# Altium PCB LED主控.pcbdoc (part 2 of 2)
Units mil, origin at the board's own origin, x right, y up, seen from the top; angles counter-clockwise.
Board outline 4187.79 x 2551 mil, 2 copper layers (Top Layer, Bottom Layer); 58 components, 35 nets, 197 pads, 174 vias.
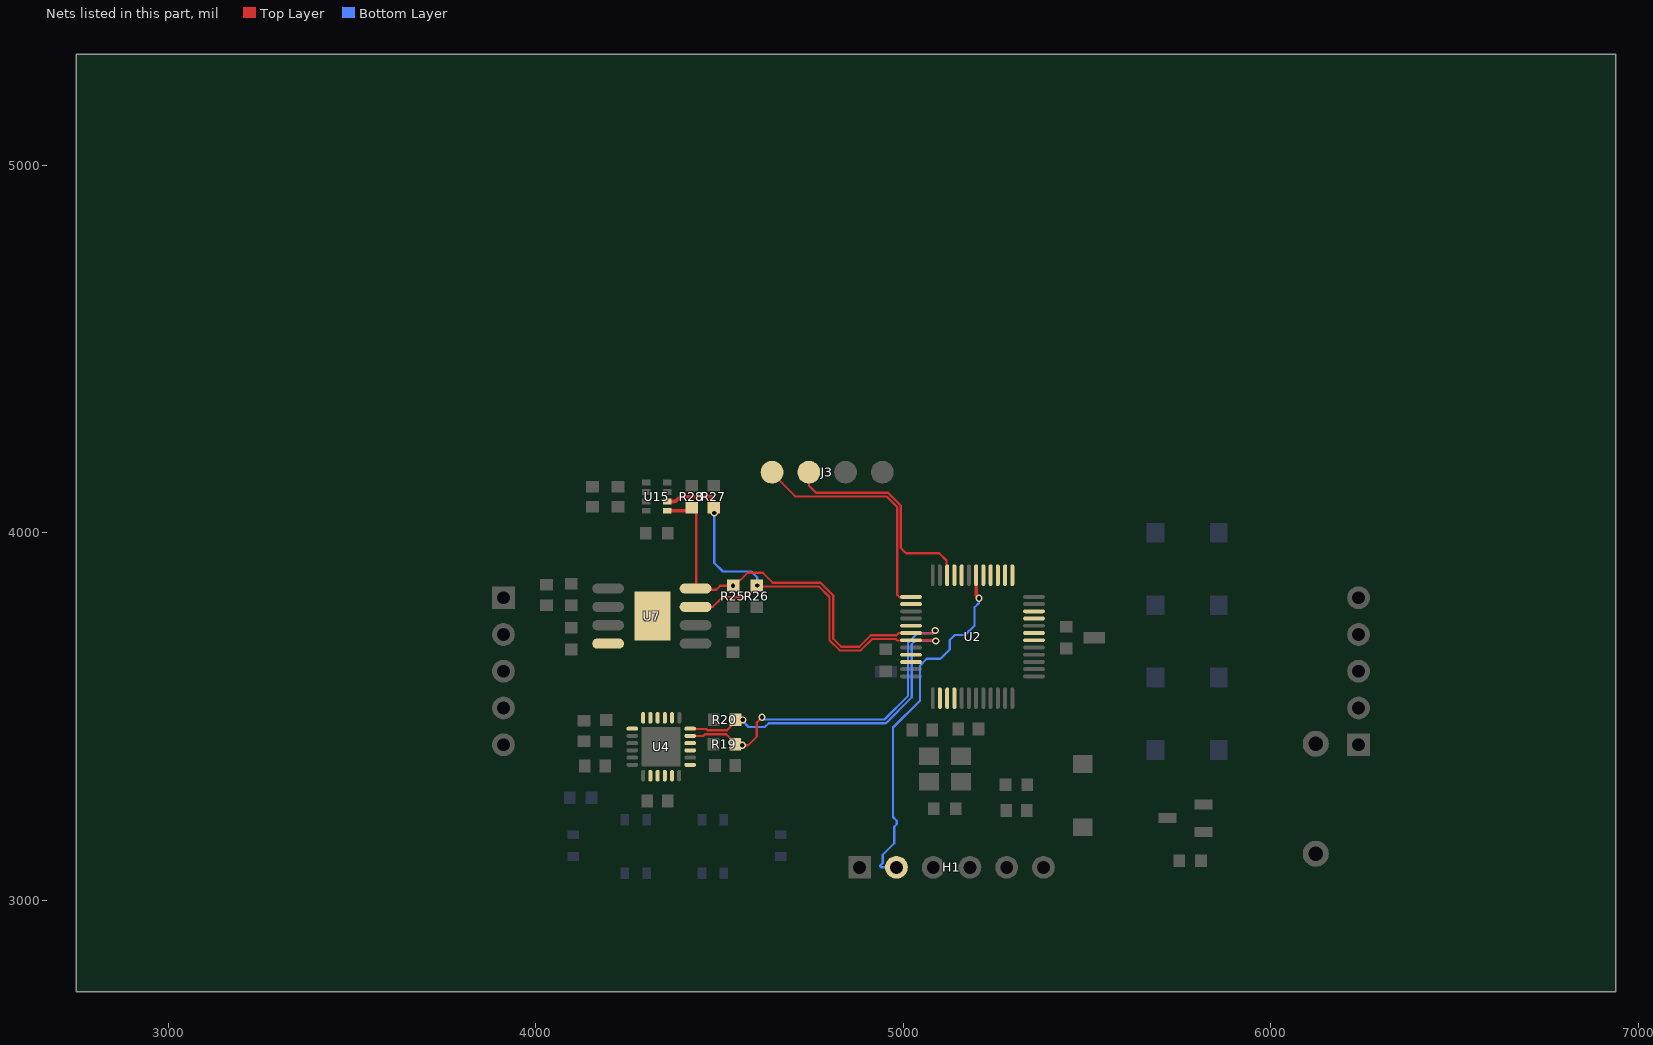
[diagram p2: the nets of this part, all layers, seen from the top]

## Via types
v1: diameter 19.68, hole 11.81, Top Layer to Bottom Layer, 173 vias
v2: diameter 24.02, hole 12.01, Top Layer to Bottom Layer, 1 vias

## Nets (pads, with @x,y where several pads share a name; then routed paths per layer and width w, separated by ;. In a path a pad name is that pad's centre, name@x,y a point inside that pad or via, vN(x,y) a via of type N, cw(c..) or ccw(c..) an arc to the next point about the centre after c; other vN are vias at no path point) (continued)
SCL: R19.1 R25.1 R28.2 U2.42 U4.23 U7.8 U15.4 | length 2019.5
  Top Layer w6: R28.2@4422.12,4065.72 4436.47,4051.37 U7.8@4436.47,3851.86 ; U4.23@4424.56,3446.87 4455.35,3446.87 4455.47,3446.75 4460.01,3451.29 4518.39,3451.29 R19.1@4540.46,3429.21 ; U7.8@4443.15,3844.21 4490.75,3844.21 4501.93,3855.39 R25.1@4536.52,3855.39 ; R25.1@4537.25,3856.12 R25.1@4536.52,3855.39 ; R25.1@4539.95,3854.52 4576.38,3890.94 4617.41,3890.94 4644.72,3863.64 4774.26,3863.64 4809.1,3828.79 4809.1,3711.42 4830.99,3689.53 4879.94,3689.53 4911.1,3720.69 4981.29,3720.69 4987.29,3726.69 U2.42@5021.79,3726.69 ; R25.1@4539.95,3855.39 R25.1@4536.52,3855.39 ; v1(4561.83,3421.59) 4577.56,3421.59 4600.86,3444.89 4600.86,3483.32 v1(4615.42,3497.87) ; U2.42@5020.43,3725.08 5078.5,3725.08 v1(5086.9,3733.48)
  Top Layer w10: U15.4@4357.43,4059.15 4402.81,4059.15 ccw(c4402.81,4088.96) R28.2@4423.89,4067.88
  Bottom Layer w6: v1(4615.42,3497.87) 4621.84,3491.45 4948.67,3491.45 5012.98,3555.76 5012.98,3700.63 5038.65,3726.3 5079.72,3726.3 v1(5086.9,3733.48)
  other v1: 4536.61,3855.73
SDA: R20.1 R26.1 R27.2 U2.43 U4.24 U7.7 U15.3 | length 2120.4
  Top Layer w6: U4.24@4423.15,3465.64 4463.71,3465.64 4466.9,3462.45 4519.98,3462.45 R20.1@4538.62,3481.09 ; U7.7@4434.73,3797.85 4481.34,3797.85 4507.73,3824.24 4572.73,3824.24 4601.67,3853.18 R26.1@4601.67,3856.17 ; R26.1@4603.16,3853.62 4770.11,3853.62 4799.09,3824.64 4799.09,3707.27 4826.85,3679.51 4884.06,3679.51 4915.24,3710.69 4979.13,3710.69 4983.23,3706.59 U2.43@5021.86,3706.59 ; U2.43@5023.99,3706.8 5086.35,3706.8 v1(5088.01,3705.15)
  Top Layer w10: U15.3@4357.43,4084.75 4374.69,4084.75 ccw(c4374.69,4096.09) 4382.71,4088.07 cw(c4406.04,4064.74) 4406.04,4097.74 4473.48,4097.74 cw(c4473.48,4089.13) 4479.57,4095.22 cw(c4467.4,4083.04) 4484.61,4083.04 R27.2@4484.61,4066.22
  Bottom Layer w6: v1(4485.59,4053.21) 4485.59,3917.44 4508.95,3894.08 4585.94,3894.08 4602.35,3877.67 v1(4602.35,3856.22) ; v1(4562.66,3490.3) 4562.66,3487.18 4578.87,3470.97 4622.99,3470.97 4633.46,3481.45 4952.83,3481.45 5023,3551.61 5023,3696.51 5031.64,3705.15 v1(5088.01,3705.15)
SWCLK: J3.4 U2.37 | length 654.8
  Top Layer w6: J3.4@4647.47,4157.02 4705.98,4098.52 4953.99,4098.52 4983.1,4069.41 4983.1,3830.96 4989.72,3824.34 5023.88,3824.34 U2.37@5024.55,3823.66
SWDIO: J3.3 U2.34 | length 604.4
  Top Layer w6: J3.3@4742.91,4163.09 4742.91,4127.85 4762.24,4108.52 4958.13,4108.52 4993.11,4073.54 4993.11,3957.96 5007.27,3943.8 5097.79,3943.8 5117.47,3924.11 U2.34@5117.47,3881.62
TX: H1.2 U2.30 | length 993.1
  Top Layer w10: U2.30@5198.2,3878.91 5198.2,3828.99 v1(5205.68,3821.51)
  Bottom Layer w6: H1.2@4981.11,3089.24 4939.23,3089.24 4937.11,3091.36 4937.11,3094.36 4943.64,3100.89 4943.64,3123.29 4975.23,3154.87 4975.23,3200.28 4981.77,3206.82 4981.77,3216.12 4971.92,3225.97 4971.92,3469.39 5045.01,3542.49 5045.01,3637.79 5063.71,3656.48 5101.11,3656.48 5126.28,3681.65 5126.28,3707.63 5139.89,3721.24 5167.7,3721.24 5193.87,3747.4 5193.87,3796.85 5205.68,3808.67 v1(5205.68,3821.51)
"": U2.2 U2.3 U2.4 U2.18 U2.19 U2.21 U2.22 U2.25 U2.26 U2.27 U2.28 U2.29 U2.32 U2.33 U2.38 U2.41 U2.45 U2.46 U4.2 U4.3 U4.4 U4.5 U4.6 U4.7 U4.14 U4.15 U4.16 U4.17 U4.19 U4.21 U4.22 U7.4 U7.9

## Polygon pours and split planes (outlines as drawn)
GND on Bottom Layer (solid, remove dead copper, pour order 0): 3825.29,3001.27 6687.79,3001.27 6687.79,4493.27 3825.29,4493.27
GND on Top Layer (hatched 45Degree grid 20 track 10, remove dead copper, pour order 1): 3000,3000 6512.6,3000 6512.6,5051 3000,5051

## Keep-outs
Top Layer:
  region net "": 4126.81,3093.27 4641.81,3093.27 4641.81,3193.27 4126.81,3193.27
  region net "": 4126.81,3093.27 4641.81,3093.27 4641.81,3193.27 4126.81,3193.27
Bottom Layer:
  region net "": 5029.05,3225.28 5194.07,3225.28 5194.07,3474.64 5029.05,3474.64
  region net "": 4126.81,3093.27 4641.81,3093.27 4641.81,3193.27 4126.81,3193.27
Board Outline Layer:
  lines w10 net "": 3861.81,3032.17 6288.58,3032.17 6288.58,4213.27 3861.81,4213.27 3861.81,3032.17

## Other copper
Top Layer:
  region net KEY3: 6233.93,3460.08 6225.44,3460.08 6221.2,3453.72 6269.58,3453.72
  region net MAX7219_CS: 3929.14,3497.01 3964.04,3515.71 3964.82,3521.71 3935.15,3543.12
  region net MAX7219_DIN: 3932.99,3600.09 3964.59,3620.64 3964.42,3626.64 3931.62,3646.57
  region net 3V3: 3915.31,3868.72 3902.81,3853.72 3937.81,3853.72 3925.31,3868.72
  region net 3V3: 4121.17,4129.79 4121.17,4119.79 4136.17,4109.35 4136.17,4140.85
  region net 3V3: 4186.61,4120.94 4186.61,4130.94 4171.61,4140.85 4171.61,4109.35
  region net 3V3: 4191.17,4120.94 4206.17,4109.35 4206.17,4140.85 4191.17,4130.94
  region net 3V3: 4241.74,4128.4 4241.74,4138.4 4213.1,4140.85 4241.61,4115.9
  region net $1N131: 4298.23,4029.55 4285.73,4014.55 4315.11,4014.55 4308.23,4029.55
  region net SCL: 4402.81,4064.15 4402.81,4054.15 4432.35,4052.01 4406.88,4077.34
  region net 3V3: 4403.43,4130.21 4403.43,4120.21 4406.88,4111.33 4406.88,4142.71
  region net 3V3: 4449.9,4129.19 4440.9,4136.69 4440.9,4115.69 4449.9,4123.19
  region net SDA: 4476.04,4091.68 4466.88,4083.76 4500.9,4083.76 4484.28,4097.48
  region net 3V3: 4457.88,4129.19 4457.88,4123.19 4466.88,4115.69 4466.88,4136.69
  region net 3V3: 4332.93,4095.02 4345.62,4102.46 4345.62,4118.21 4332.05,4107.07
  region net 3V3: 4381.38,4121.08 4369.24,4118.21 4369.24,4102.46 4383.23,4109.78
  region net 3V3: 4334.1,4125.16 4332.23,4113.64 4345.62,4102.46 4345.62,4118.21
  region net SDA: 4374.69,4089.75 4369.24,4092.63 4369.24,4076.88 4374.69,4079.75
  region net SCL: 4384.24,4064.15 4369.24,4067.03 4369.24,4051.28 4384.24,4054.15
  region net 3V3: 4324.3,4120.76 4325.84,4132.21 4312.16,4143.81 4312.16,4128.06
  region net 3V3: 4273.54,4128.3 4288.54,4128.06 4288.54,4143.81 4273.54,4138.3
  region net 3V3: 4323.59,4099.85 4312.16,4092.63 4312.16,4076.88 4325.69,4088.56
  region net $1N131: 4298.23,4046.7 4308.23,4046.7 4312.16,4051.28 4288.54,4051.28
  region net BAT: 4509.96,3737.24 4509.96,3731.24 4518.96,3723.74 4518.96,3744.74
  region net 3V3: 4607.41,3765.98 4618.68,3780.98 4584.91,3780.98 4597.41,3765.98
  region net 3V3: 4575.66,3799.82 4575.66,3793.82 4584.66,3786.32 4584.66,3807.32
  region net SDA: 4578.3,3834.05 4586.67,3833.93 4603.64,3840.3 4584.66,3851.02
  region net SDA: 4627.68,3856.62 4618.68,3864.12 4618.68,3843.12 4627.68,3850.62
  region net 3V3: 4562.68,3799.82 4553.68,3807.32 4553.68,3786.32 4562.68,3793.82
  region net SCL: 4510.66,3852.39 4519.66,3844.89 4519.66,3865.89 4510.66,3858.39
  region net SCL: 4560.05,3870.37 4559.6,3878.41 4542.63,3872.05 4553.68,3853.4
  region net 3V3: 4064.67,3808.25 4064.67,3798.24 4079.66,3785.98 4079.66,3817.73
  region net 3V3: 4122.68,3804.85 4113.68,3812.35 4113.68,3791.35 4122.68,3798.85
  region net $1N255: 4122.21,3860.66 4113.68,3868.16 4113.68,3847.16 4122.21,3854.66
  region net 3V3: 4083.08,3655.37 4113.68,3665.98 4079.66,3683.78 4069.06,3655.49
  region net DS3231_INT: 4122.68,3744.17 4113.68,3751.67 4113.68,3730.67 4122.68,3738.17
  region net $1N255: 4144.65,3850.35 4144.87,3844.35 4158.89,3836.85 4157.72,3857.85
  region net 3V3: 4144.8,3801.05 4144.71,3795.05 4158.04,3787.55 4158.52,3808.55
  region net DS3231_INT: 4145.14,3752.24 4144.51,3746.24 4156.86,3738.74 4160.23,3759.74
  region net SCL: 4487.02,3847.21 4476.2,3854.71 4464.25,3834.07 4485.33,3841.21
  region net SCL: 4439.47,3870.63 4433.47,3870.63 4425.97,3861.63 4446.97,3861.63
  region net SDA: 4481.34,3800.85 4473.18,3808.35 4473.18,3787.35 4481.34,3794.85
  region net BAT: 4479.11,3750.85 4473.18,3758.35 4473.18,3737.35 4479.11,3744.85
  region net $1N1026: 4217.18,3432.42 4208.18,3439.92 4208.18,3418.92 4217.18,3426.42
  region net 3V3: 4490.13,3522.44 4480.13,3522.44 4468.2,3507.44 4499.95,3507.44
  region net SDA: 4521.16,3467.87 4528.83,3467.06 4545.8,3473.42 4527.52,3484.84
  region net 3V3: 4508.45,3420.53 4508.45,3426.53 4499.45,3434.03 4499.45,3413.03
  region net SCL: 4527.12,3446.8 4520.66,3444.78 4527.02,3427.8 4544.09,3440.43
  region net 3V3: 4098.45,3434.98 4098.45,3424.98 4113.45,3417.01 4113.45,3447.48
  region net 3V3: 4155.25,3454.8 4138.34,3448.51 4148.89,3429.35 4155.25,3446.32
  region net $1N454: 4206.32,3389.4 4189.35,3383.03 4204.48,3368.47 4210.84,3385.44
  region net 3V3: 4383.48,3261.75 4374.48,3269.25 4374.48,3252.6 4383.48,3255.75
  region net 3V3: 4363.67,3296.64 4357.67,3296.64 4350.17,3288.03 4371.17,3288.03
  region net 3V3: 4238.25,3449.27 4238.99,3443.27 4252.19,3441.32 4252.19,3452.34
  region net $1N1026: 4242.67,3429.29 4242.67,3423.29 4252.19,3421.63 4252.19,3432.65
  region net $1N454: 4238.12,3409.61 4239.25,3403.61 4252.19,3401.95 4252.19,3412.97
  region net MPU6050_INIT: 4242.81,3363.55 4252.19,3362.58 4252.19,3373.6 4242.81,3369.55
  region net 3V3: 4294.13,3316.28 4297.47,3328.33 4286.45,3328.33 4288.13,3316.28
  region net $1N460: 4444.56,3388.82 4430.15,3393.28 4430.15,3382.26 4441.56,3382.82
  region net SCL: 4443.74,3449.87 4430.15,3452.34 4430.15,3441.32 4443.8,3443.87
  region net SDA: 4444.23,3468.64 4430.15,3472.02 4430.15,3461 4443.07,3462.64
  region net BOOT0: 4978.67,3690.42 4969.67,3697.92 4969.67,3676.92 4978.67,3684.42
  region net BOOT1: 5416.72,3748.13 5416.72,3742.13 5425.72,3734.63 5425.72,3755.63
  region net $1N3910: 5440.65,3708.71 5433.15,3700.45 5454.15,3700.45 5446.65,3708.71
  region net $1N3910: 5480.89,3716.73 5480.89,3710.73 5489.89,3703.23 5489.89,3724.23
  region net 3V3: 5341.06,3340.24 5335.06,3340.24 5327.56,3331.24 5348.56,3331.24
  region net NRST: 5255.09,3310.41 5262.19,3302.91 5262.19,3323.91 5255.09,3316.41
  region net NRST: 5278.77,3288.23 5284.77,3288.23 5292.27,3297.23 5271.27,3297.23
  region net NRST: 5278.77,3270.95 5271.27,3261.95 5292.27,3261.95 5284.77,3270.95
  region net NRST: 5283.46,3217.53 5291.4,3226.52 5270.38,3226.52 5277.45,3217.53
  region net NRST: 5451.96,3200.14 5451.96,3194.14 5460.96,3186.64 5460.96,3207.64
  region net 3V3: 5059.54,3554.58 5059.54,3544.58 5074.54,3532.08 5074.54,3567.08
  region net 3V3: 5074.55,3583.32 5074.54,3573.82 5085.17,3573.82 5084.55,3583.32
  region net PD0: 5161.59,3515.12 5163.9,3525.41 5153.27,3525.41 5155.59,3515.12
  region net PD1: 5181.28,3515.12 5183.6,3525.4 5172.97,3525.4 5175.28,3515.12
  region net NRST: 5194.51,3512.37 5200.51,3511.74 5203.28,3525.41 5192.65,3525.41
  region net 3V3: 5240.49,3513.22 5242.64,3525.4 5232.01,3525.4 5234.49,3513.22
  region net KEY1: 5259.72,3511.83 5262.33,3525.41 5251.7,3525.41 5253.72,3512.24
  region net KEY2: 5279.51,3517.1 5282.01,3525.4 5271.38,3525.4 5273.51,3517.1
  region net KEY3: 5298.42,3519.57 5301.7,3525.41 5291.07,3525.41 5292.42,3519.57
  region net MAX7219_CS: 5317.43,3610.95 5318.44,3604.95 5331.23,3603.36 5331.23,3613.99
  region net KEY4: 5392.58,3631.94 5379.65,3633.67 5379.65,3623.04 5393.39,3625.94
  region net MAX7219_CLK: 5318.28,3651.6 5317.49,3645.6 5331.22,3642.72 5331.22,3653.35
  region net MAX7219_DIN: 5317.27,3689.32 5318.82,3683.32 5331.23,3682.08 5331.23,3692.71
  region net BOOT1: 5393.7,3748.13 5379.65,3751.79 5379.65,3741.16 5391.72,3742.13
  region net 3V3: 5362.52,3839.52 5356.52,3839.52 5349.02,3830.52 5370.02,3830.52
  region net TX: 5203.2,3844.14 5203.28,3860.04 5192.65,3860.04 5193.2,3842.68
  region net RX: 5183.16,3842.95 5183.6,3860.05 5172.97,3860.05 5173.16,3843.61
  region net SWDIO: 5114.47,3919.86 5113.9,3908.46 5124.53,3908.46 5120.47,3922.63
  region net 3V3: 5065.54,3884.06 5065.54,3878.06 5074.54,3870.56 5074.54,3891.56
  region net SWCLK: 4989.72,3821.34 4996.59,3819.89 4996.59,3830.52 4989.72,3827.34
  region net DS3231_INT: 4980.83,3780.58 4996.59,3780.52 4996.59,3791.15 4979.18,3790.58
  region net MPU6050_INIT: 4979.64,3761.2 4996.58,3760.83 4996.58,3771.46 4979.94,3771.2
  region net SCL: 4987.29,3723.69 4996.59,3721.46 4996.59,3732.09 4987.29,3729.69
  region net SCL: 5059.17,3728.08 5045.01,3732.09 5045.01,3721.46 5056.49,3722.08
  region net SDA: 4983.23,3709.59 4983.59,3703.59 4996.59,3701.78 4996.59,3712.41
  region net SDA: 5058.59,3709.8 5045.01,3712.41 5045.01,3701.78 5058.19,3703.8
  region net BOOT0: 4983.21,3690.42 4983.19,3684.42 4996.59,3682.09 4996.59,3692.72
  region net 3V3: 5016.76,3594.35 5022.76,3594.35 5030.26,3603.35 5009.26,3603.35
  region net 3V3: 4989.59,3611.65 4989.59,3605.65 4996.59,3603.35 4996.59,3613.98
  region net $1N1067: 5813.84,3132.87 5806.34,3123.87 5825.77,3123.87 5819.84,3132.87
  region net $1N815: 6150.4,3147.5 6127.81,3186.12 6121.81,3186.57 6097.4,3151.52
  region net 3V3: 6097.33,3400.04 6121.7,3364.92 6127.7,3365.36 6150.33,3403.91
  region net $1N1067: 5813.84,3163.03 5819.84,3163.03 5827.34,3172.03 5806.34,3172.03
  region net $1N815: 5839.51,3240.46 5841.48,3249.11 5792.26,3246.83 5831.03,3240.46
  region net SWDIO: 4719.6,4143.6 4739.91,4127.85 4745.91,4127.85 4766.1,4143.87
  region net SWCLK: 4639.04,4133.46 4676.5,4123.75 4680.99,4127.75 4673.73,4164.43
  region net PD1: 5120.05,3388.21 5129.05,3380.71 5129.05,3401.71 5120.05,3394.21
  region net PD0: 5106.55,3325.31 5097.55,3332.81 5097.55,3311.81 5106.55,3319.31
  region net PD1: 5127.18,3448.36 5129.46,3442.15 5146.43,3448.51 5133.55,3465.33
  region net PD1: 5127.18,3482.3 5127.18,3473.81 5133.55,3448.51 5136.14,3483.95
  region net PD0: 5101.02,3474.66 5101.02,3483.14 5088.35,3481.07 5094.66,3457.69
  region net PD0: 5098.75,3439.28 5101.02,3445.49 5094.66,3462.46 5081.78,3445.64
  region net PD0: 5105.33,3246.24 5105.33,3252.24 5098.94,3259.74 5098.94,3238.74
  region net PD1: 5121.57,3252.24 5121.57,3246.24 5126.51,3238.74 5126.51,3259.74
  region net 3V3: 4061.66,3808.3 4046.67,3818.48 4046.67,3786.98 4061.66,3798.3
  region net 3V3: 3996.23,3807.52 3996.23,3797.52 4011.23,3786.98 4011.23,3818.48
  region net 3V3: 5526.35,3797.81 5516.35,3797.81 5503.85,3779.51 5538.85,3776.68
  region net 3V3: 4881.98,3640.92 4875.98,3640.92 4868.48,3636.59 4889.48,3636.59
  region net 3V3: 4904.36,3599.23 4898,3616.2 4884.51,3599.98 4901.48,3593.62
  region net 3V3: 5040.35,3884.06 5031.35,3891.56 5031.35,3870.56 5040.35,3878.06
  region net 3V3: 5362.52,3853.97 5370.02,3862.97 5349.02,3862.97 5356.52,3853.97
  region net 3V3: 5280.53,3435.95 5288.03,3444.95 5267.03,3444.95 5274.53,3435.95
  region net 3V3: 5280.53,3417.53 5274.53,3417.53 5267.03,3408.53 5288.03,3408.53
  region net 3V3: 5281.81,3360.95 5288.96,3369.95 5267.94,3369.95 5275.8,3360.95
  region net 3V3: 5016.76,3586.84 5009.26,3577.84 5030.26,3577.84 5022.76,3586.84
  region net 3V3: 5049.87,3554.58 5034.87,3567.08 5034.87,3539.26 5049.87,3544.58
  region net SCL: 4529.85,3862.88 4519.77,3858.39 4519.98,3852.39 4530.36,3848.12
  region net SCL: 4545.69,3851.93 4552.01,3862.33 4549.23,3868.04 4539.24,3865.21
  region net SDA: 4592.56,3855.16 4589.24,3844.99 4594.21,3841.48 4604.62,3846.64
  region net SDA: 4606.68,3847.38 4618.16,3850.62 4619.81,3856.62 4610.58,3861.62
  region net SCL: 4568.34,3414.21 4577.56,3418.59 4577.56,3424.59 4568.34,3428.97
  region net SCL: 5077.08,3734.09 5076.38,3727.2 5080.62,3722.95 5087.52,3723.65
  region net SDA: 5082.83,3713.52 5071.83,3709.8 5070.8,3703.8 5080.35,3698.96
  region net SCL: 4605.59,3498.49 4601.46,3488.16 4605.71,3483.92 4616.03,3488.05
  region net MPU6050_INIT: 4245.51,3359.01 4255.52,3363.55 4255.22,3369.55 4244.77,3373.76
  region net DS3231_INT: 4192.09,3755.61 4180.73,3752.24 4179.26,3746.24 4188.56,3741.27
  region net MAX7219_CS: 5309.44,3600.11 5318.98,3604.95 5317.96,3610.95 5306.96,3614.66
  region net MAX7219_CLK: 5309.97,3640.65 5319.31,3645.6 5317.89,3651.6 5306.59,3655.02
  region net MAX7219_DIN: 5309.19,3678.55 5318.85,3683.32 5318.02,3689.32 5307.17,3693.17
  region net RX: 5179.87,3820.99 5181.7,3826.18 5174.63,3833.25 5169.43,3831.43
  region net TX: 5206.3,3831.33 5201.73,3832.53 5194.66,3825.46 5195.86,3820.89
  region net DS3231_INT: 4960.48,3786.42 4968.23,3782.04 4975.3,3789.11 4970.91,3796.86
  region net MPU6050_INIT: 4972.2,3757.92 4973.58,3762.66 4966.51,3769.73 4961.76,3768.35
  region net 3V3: 4885.84,3658.22 4881.71,3647.89 4885.95,3643.65 4896.28,3647.78
  region net 3V3: 4889.15,3664.98 4878.93,3662.6 4878.93,3652.6 4889.15,3650.22
  region net MAX7219_CS: 5096.9,3162.27 5092.77,3151.94 5097.01,3147.7 5107.34,3151.83
  region net MAX7219_CLK: 3980.59,3565.53 3975.96,3575.4 3969.96,3574.91 3965.88,3564.31
  region net 3V3: 4092.84,3808.42 4081.59,3807.96 4077.5,3798.03 4087.21,3794.77
  region net 3V3: 4104.35,3793.84 4113.54,3798.85 4111.8,3804.85 4100.24,3808.02
  region net 3V3: 4087.5,3677.98 4082.55,3668.98 4090.93,3663.22 4099.66,3669.62
  region net 3V3: 4492.26,3415.91 4502.15,3420.53 4501.69,3426.53 4491.12,3430.63
  region net 3V3: 4492.07,3497.54 4490.13,3508.06 4480.13,3509.25 4477.41,3499.28
  region net 3V3: 4126.24,3437.53 4116.14,3434.98 4116.69,3424.98 4127.04,3422.79
  region net 3V3: 4142.76,3428.45 4147.78,3438.85 4144.18,3443.73 4133.98,3440.32
  region net 3V3: 4367.49,3274.17 4363.67,3285.06 4357.67,3285.95 4352.88,3276.32
  region net KEY1: 5888.17,3402.57 5894.81,3406.95 5894.81,3412.95 5888.17,3417.33
  region net KEY1: 5874.18,3416.34 5864.53,3411.56 5865.39,3405.56 5876.26,3401.72
  region net KEY2: 5880.42,3597.57 5890.75,3593.44 5894.99,3597.68 5890.86,3608.01
  region net KEY2: 5875.74,3615.69 5864.81,3611.9 5863.88,3605.9 5873.48,3601.1
  region net KEY3: 5877.94,3793.77 5888.27,3789.65 5892.51,3793.89 5888.38,3804.21
  region net KEY3: 5868.9,3805.48 5859.76,3800.6 5864.37,3794.6 5877.9,3793.78
  region net KEY4: 5879.97,3992.39 5889.9,3989.67 5892.34,3995.72 5885.49,4006.08
  region net KEY4: 5870.18,4009.05 5859.96,4004.67 5859.96,3998.67 5870.18,3994.28
  region net BUZZ: 5409.01,3658.06 5400.47,3653.67 5400.47,3647.67 5409.01,3643.29
  region net BAT: 6169.75,3828.51 6165.62,3818.19 6169.87,3813.94 6180.19,3818.07
  region net BAT: 6169.56,3574.89 6164.7,3584.07 6158.7,3579.34 6157.97,3565.74
  region net BAT: 5591.57,3206.12 5595.95,3195.9 5601.95,3195.9 5606.33,3206.12
  region net BAT: 4544.7,3271.51 4555.02,3267.38 4559.27,3271.62 4555.14,3281.95
  region net 3V3: 6131.96,3330.27 6127.7,3340.65 6121.7,3340.88 6117.2,3330.81
  region net KEY1: 5912.75,3260.03 5908.25,3270.09 5902.25,3269.87 5898,3259.48
  region net KEY2: 5944.69,3259.08 5940.3,3264.01 5934.3,3264.01 5929.92,3259.08
Bottom Layer:
  region net BAT: 6222.25,3849.07 6186.52,3830.9 6185.5,3824.9 6214.48,3803.22
  region net 3V3: 6213.89,3641.47 6185.05,3621.6 6187.06,3611.6 6223.07,3595.88
  region net KEY2: 5404.4,3109.7 5384.16,3122.54 5378.16,3122.54 5357.9,3109.78
  region net KEY1: 5304.71,3109.34 5284.64,3137.1 5278.64,3137.1 5258.21,3110.13
  region net 3V3: 5111.9,3085.65 5121.54,3123.09 5117.53,3127.56 5080.82,3120.24
  region net TX: 4960.61,3112.49 4939.23,3092.24 4939.23,3086.24 4960.61,3065.99
  region net RX: 4921.11,3086.24 4921.11,3092.24 4912.11,3099.74 4912.11,3078.74
  region net MAX7219_CLK: 3937.71,3405.69 3957.35,3427.88 3957.35,3433.88 3925.47,3450.55
  region net 3V3: 6148.7,3448.79 6127.12,3485.59 6117.12,3485.59 6095.55,3448.78
  region net $1N5126: 4455.27,3052.81 4462.77,3057.53 4441.77,3057.53 4449.27,3052.81
  region net $1N5126: 4448.81,3053.27 4454.81,3053.27 4462.31,3057.53 4441.31,3057.53
  region net $1N5126: 4322.16,3221.27 4313.16,3228.77 4313.16,3207.77 4322.16,3215.27
  region net $1N5126: 4106.81,3204.62 4096.81,3204.62 4086.06,3189.62 4117.56,3189.62
  region net $1N5126: 4077.06,3174.81 4086.06,3167.31 4086.06,3188.31 4077.06,3180.81
  region net $1N5126: 4514.34,3243.02 4508.34,3243.02 4500.84,3234.02 4521.84,3234.02
  region net $1N5126: 4532.16,3216.27 4523.16,3223.77 4523.16,3202.77 4532.16,3210.27
  region net $1N5126: 4245.27,3053.27 4252.77,3057.53 4231.77,3057.53 4239.27,3053.27
  region net $1N5126: 4221.46,3076.27 4221.46,3070.27 4230.46,3062.77 4230.46,3083.77
  region net $1N5126: 4663.81,3097.93 4669.81,3097.93 4677.31,3106.93 4656.31,3106.93
  region net $1N5126: 4691.55,3115.74 4691.55,3121.74 4682.55,3129.24 4682.55,3108.24
  region net 3V3: 4136.55,3301.64 4131.02,3298.69 4135.59,3283.51 4153.52,3295.28
  region net $1N5126: 4106.81,3246.26 4108.03,3261.26 4084.31,3261.26 4096.81,3246.26
  region net 3V3: 4961.83,3705.13 4951.83,3705.13 4939.33,3688.39 4974.33,3682.39
  region net 3V3: 4913.82,3660.6 4914.63,3654.6 4923.22,3656.38 4923.49,3668.1
  region net SDA: 4609.73,3862.73 4605.35,3872.95 4599.35,3872.95 4594.97,3862.73
  region net SDA: 4559.85,3480.87 4570.27,3475.33 4575.49,3478.59 4572.37,3488.7
  region net SCL: 5077.08,3734.09 5077.6,3728.42 5081.85,3724.18 5087.52,3723.65
  region net SDA: 5081.5,3712.53 5071.27,3708.15 5071.27,3702.15 5081.5,3697.76
  region net SDA: 4478.2,4046.7 4482.59,4036.48 4488.59,4036.48 4492.97,4046.7
  region net MPU6050_INIT: 4246.3,3359.88 4255.84,3364.72 4254.82,3370.72 4243.82,3374.43
  region net DS3231_INT: 4203.16,3739.5 4213.38,3743.89 4213.38,3749.89 4203.16,3754.27
  region net MAX7219_CS: 5302.4,3616.11 5292.07,3620.24 5287.83,3616 5291.96,3605.67
  region net MAX7219_CLK: 5295.43,3653.73 5285.21,3649.35 5285.21,3643.35 5295.43,3638.96
  region net MAX7219_DIN: 5291.99,3686.38 5287.39,3676 5291.29,3671.41 5301.55,3675.13
  region net 3V3: 5020.92,3891.58 5015.37,3882.67 5022.44,3875.6 5031.36,3881.14
  region net 3V3: 5038.12,3897.48 5035.74,3907.7 5025.74,3907.7 5023.36,3897.48
  region net 3V3: 5037.25,3883.59 5047.47,3885.97 5047.47,3895.97 5037.25,3898.35
  region net RX: 5162.67,3815.09 5167.05,3808.67 5173.05,3808.67 5177.43,3815.09
  region net TX: 5198.3,3815 5202.68,3808.67 5208.68,3808.67 5213.06,3815
  region net 3V3: 5346.48,3880.76 5337.57,3886.3 5330.5,3879.23 5336.04,3870.32
  region net DS3231_INT: 4951.27,3796.86 4947.14,3786.54 4951.38,3782.29 4961.71,3786.42
  region net MPU6050_INIT: 4963,3768.35 4952.67,3772.48 4948.43,3768.24 4952.56,3757.92
  region net 3V3: 4902.17,3650.22 4912.4,3654.6 4912.4,3660.6 4902.17,3664.98
  region net MAX7219_CLK: 5076.46,3163.05 5079.66,3173.18 5074.53,3176.54 5064.12,3171.15
  region net MAX7219_DIN: 5036.54,3161.04 5040.67,3171.36 5036.43,3175.61 5026.1,3171.48
  region net MAX7219_CLK: 3966.39,3551.92 3970.77,3541.7 3976.77,3541.7 3981.15,3551.92
  region net 3V3: 4089.53,3791.73 4092.27,3781.77 4102.27,3783.03 4104.18,3793.57
  region net 3V3: 4104.65,3685.67 4102.27,3695.9 4092.27,3695.9 4089.89,3685.67
  region net 3V3: 4492.58,3429.28 4488.2,3439.5 4482.2,3439.5 4477.82,3429.28
  region net 3V3: 4477.46,3484.56 4482.2,3474.86 4488.2,3475.61 4492.11,3486.4
  region net 3V3: 4139.65,3423.13 4149.87,3427.51 4149.87,3433.51 4139.65,3437.89
  region net 3V3: 4125.76,3424 4130.14,3413.78 4136.14,3413.78 4140.52,3424
  region net 3V3: 4364.79,3276.93 4359.81,3286.21 4353.81,3284.69 4350.48,3273.29
  region net BAT: 4543.94,3729.87 4539.81,3719.55 4544.05,3715.3 4554.38,3719.43
  region net 3V3: 5541.16,3756.45 5551.39,3758.83 5551.39,3768.83 5541.16,3771.21
  region net BUZZ: 5408.13,3644.16 5412.52,3633.94 5418.52,3633.94 5422.9,3644.16
  region net 3V3: 4946.9,4155.82 4957.33,4157.9 4958.17,4167.9 4948.14,4170.53
  region net BAT: 6186.09,3820.52 6196.31,3824.9 6196.31,3830.9 6186.09,3835.28
  region net BAT: 6160.42,3558.69 6164.8,3548.47 6170.8,3548.47 6175.18,3558.69
  region net BAT: 5606.33,3219.14 5601.95,3229.37 5595.95,3229.37 5591.57,3219.14
  region net BAT: 4546.8,3291.06 4536.42,3295.71 4532.02,3291.63 4535.48,3281.59
  region net 3V3: 6114.51,3324.65 6110.38,3314.32 6114.63,3310.08 6124.95,3314.21
  region net KEY1: 5898.24,3246.74 5902.62,3236.52 5908.62,3236.52 5913,3246.74
  region net KEY2: 5927.48,3251.95 5923.97,3241.73 5928.75,3238.03 5939.15,3242.9

## Silkscreen, mask and mechanical layers (free items; w line width, h text height)
Top Silkscreen Layer:
  text "CLK" at 4609.63,4067.01 h25.55
  text "DIO" at 4714.63,4067.01 h25.55
  text "GND" at 4814.63,4067.01 h25.55
  text "3V3" at 4919.63,4067.01 h25.55
  text "GND" at 5563.59,3646.38 h25.55
  text "DS3231" at 4213.35,3611.59 h38.94
Bottom Silkscreen Layer:
  text "GND" at 5059.63,3562.01 h25.55
Bottom Solder Mask Layer:
  region net "": 4126.61,3093.33 4641.61,3093.33 4641.61,3193.33 4126.61,3193.33

## Text inside footprints (layer, text, board x,y; h text height)
BUZZER2: Bottom Silkscreen Layer "+" at 6076.36,3450.74 h47.46 r90